# EAGLE board SparkySpecialK (EAGLE 6.5.0)
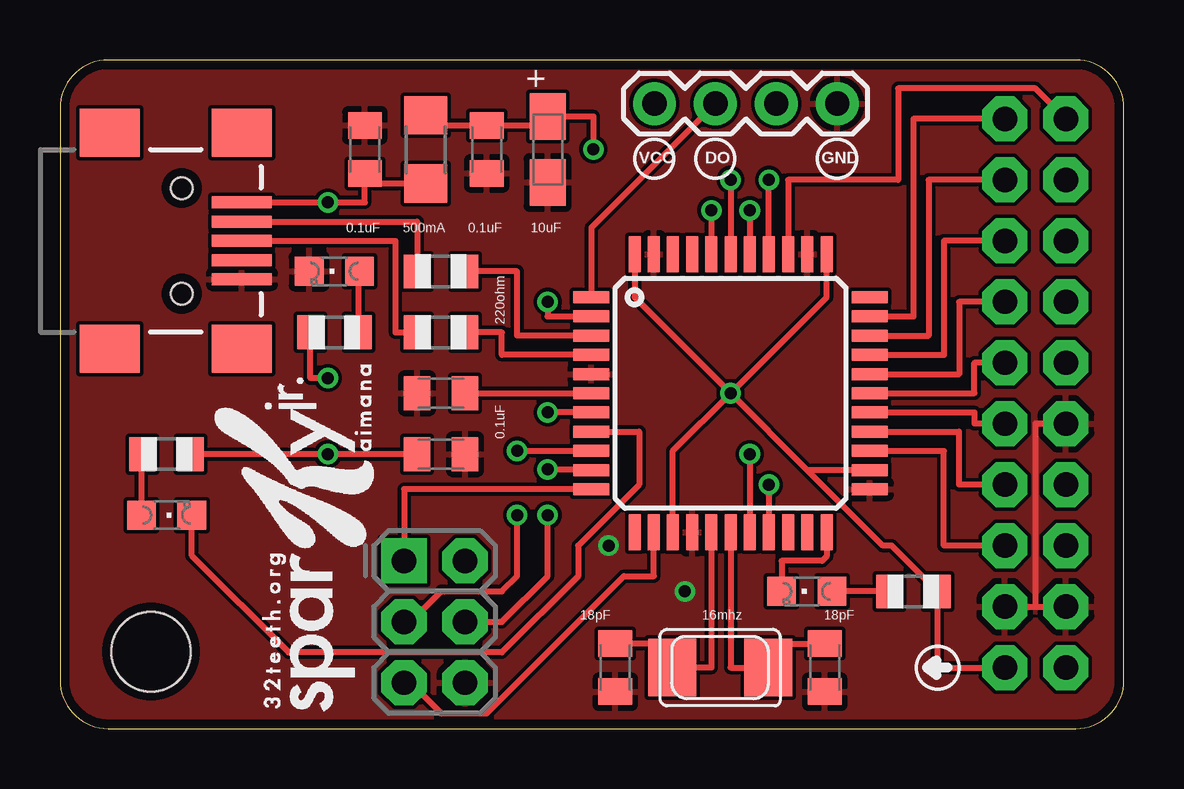
[diagram p0: board, top side]
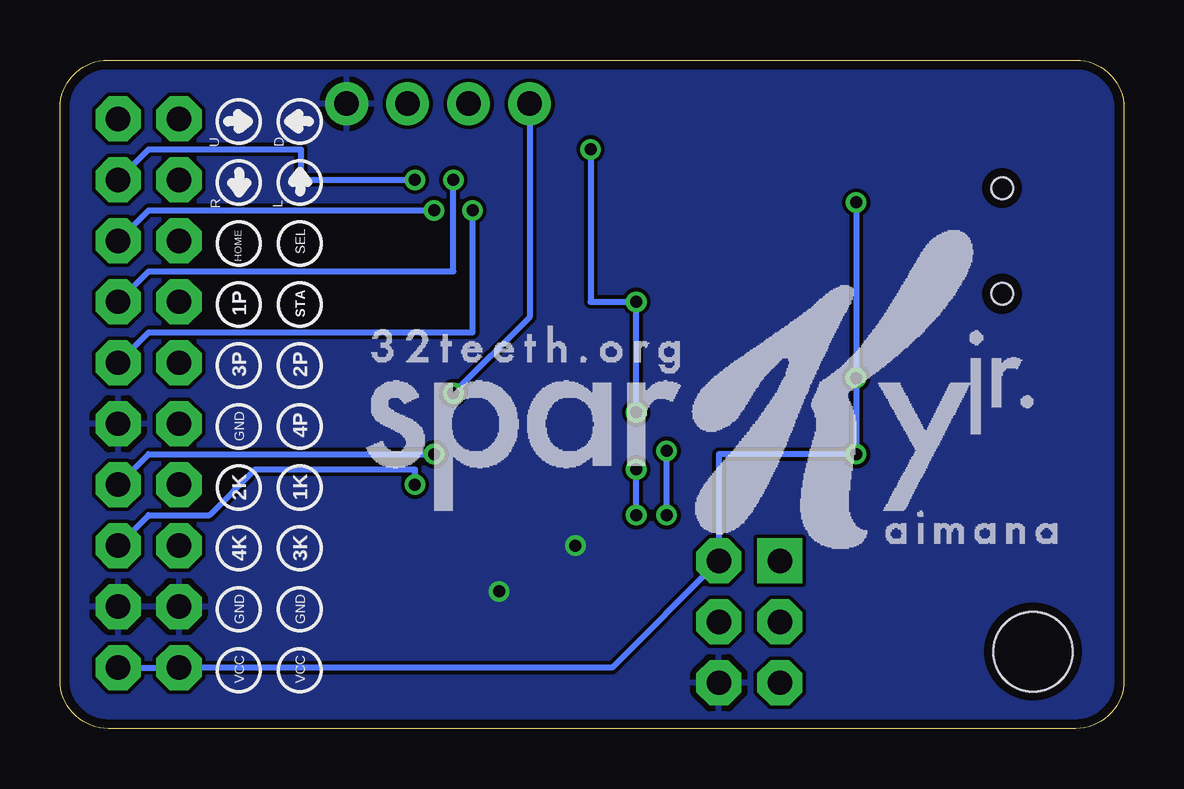
[diagram p1: board, bottom side, seen from below]

Size 44.33 x 27.86 mm. Coordinates in mm from the lower left corner, seen from the top.
Outline: 44.33,2 44.33,25.86 arc90 42.33,27.86 2,27.86 arc90 0,25.86 0,2 arc90 2,0 42.33,0 arc90 44.33,2
Copper layers (1*16): Top 0.0356mm / dielectric 1.5011mm / Bottom 0.0356mm
Design rules "LaenPCBOrder": minimum track width 6mil, minimum drill 13mil, track to track 6mil, track to pad 6mil, pad to pad 6mil, via to via 6mil, smd to smd 6mil, copper to edge 15mil, drill to drill 6mil, minimum pad ring 7mil, minimum via ring 7mil, stop-mask expansion 3mil, vias tented up to drill 0mil, thermal gap 10mil

## Footprints (pad centres in the part's own frame; a part is rotated, then mirrored left to right if it is on the bottom)
C0805K = smd 1.1 x 1.4: 1 -1,0; 2 1,0
A/3216-18R = smd 1.95 x 1.5: + 1.375,0; - -1.375,0
USB-MINIB = smd 2.5 x 0.5: D+ 2.5,0; D- 2.5,0.8; GND 2.5,-1.6; ID 2.5,-0.8; VBUS 2.5,1.6 | smd 2.5 x 2: MTN1 -3,4.5; MTN2 2.5,4.5; MTN3 -3,-4.5; MTN4 2.5,-4.5 | hole 0.9: 0,2.2; 0,-2.2
TQFP44 = smd 1.5 x 0.5: 1 -5.8,4; 2 -5.8,3.2; 3 -5.8,2.4; 4 -5.8,1.6; 5 -5.8,0.8; 6 -5.8,0; 7 -5.8,-0.8; 8 -5.8,-1.6; 9 -5.8,-2.4; 10 -5.8,-3.2; 11 -5.8,-4; 23 5.8,-4; 24 5.8,-3.2; 25 5.8,-2.4; 26 5.8,-1.6; 27 5.8,-0.8; 28 5.8,0; 29 5.8,0.8; 30 5.8,1.6; 31 5.8,2.4; 32 5.8,3.2; 33 5.8,4 | smd 0.5 x 1.5: 12 -4,-5.8; 13 -3.2,-5.8; 14 -2.4,-5.8; 15 -1.6,-5.8; 16 -0.8,-5.8; 17 0,-5.8; 18 0.8,-5.8; 19 1.6,-5.8; 20 2.4,-5.8; 21 3.2,-5.8; 22 4,-5.8; 34 4,5.8; 35 3.2,5.8; 36 2.4,5.8; 37 1.6,5.8; 38 0.8,5.8; 39 0,5.8; 40 -0.8,5.8; 41 -1.6,5.8; 42 -2.4,5.8; 43 -3.2,5.8; 44 -4,5.8
2X3-NS = drill 1.016 pad 1.88 square: 1 -2.54,-1.27 | drill 1.016 pad 1.88 octagon: 2 -2.54,1.27; 3 0,-1.27; 4 0,1.27; 5 2.54,-1.27; 6 2.54,1.27
1X04-BIG = drill 1.016 pad 1.778: 1 0,0; 2 2.54,0; 3 5.08,0; 4 7.62,0
STAND-OFF = hole 3.302: 0,0
R1206 = smd 1.6 x 1.803: 1 -1.422,0; 2 1.422,0
CHIPLED_0805 = smd 1.2 x 1.2: A 0,-1.05; C 0,1.05
R0805 = smd 1.1 x 1.4: 1 -1,0; 2 1,0
2X10_NOSILK = drill 1.016 pad 1.88 octagon: 1 -11.43,-1.27; 2 -11.43,1.27; 3 -8.89,-1.27; 4 -8.89,1.27; 5 -6.35,-1.27; 6 -6.35,1.27; 7 -3.81,-1.27; 8 -3.81,1.27; 9 -1.27,-1.27; 10 -1.27,1.27; 11 1.27,-1.27; 12 1.27,1.27; 13 3.81,-1.27; 14 3.81,1.27; 15 6.35,-1.27; 16 6.35,1.27; 17 8.89,-1.27; 18 8.89,1.27; 19 11.43,-1.27; 20 11.43,1.27
NX5032 = smd 2 x 2.4: P$1 2,0; P$2 -2,0

## Placement (x,y rotation side)
C1  0.1uF  [C0805K]  15.88,13.97 180 top
C2  18pF  [C0805K]  31.86,2.54 270 top
C3  18pF  [C0805K]  23.14,2.54 270 top
C4  0.1uF  [C0805K]  17.78,24.13 270 top
C5  10uF  [A/3216-18R]  20.32,24.13 90 top
C6  0.1uF  [C0805K]  12.7,24.13 90 top
C7  0.1uF  [C0805K]  15.88,11.43 0 top
CN1  MiniB USB  [USB-MINIB]  5.08,20.32 0 top
IC1  ATMEGA32U4-AU  [TQFP44]  27.94,13.97 0 top
ISP6  AVR_SPI_PRG_6NS  [2X3-NS]  15.61,4.45 270 top
JP1  1X4-BIG  [1X04-BIG]  32.38,26.04 180 top
JP2  STAND-OFF  [STAND-OFF]  3.79,3.2 90 top
L1  500mA  [R1206]  15.24,24.13 90 top
PWR  LED  [CHIPLED_0805]  11.43,19.05 90 top
PWR1  LED  [CHIPLED_0805]  4.45,8.89 270 top
PWR2  LED  [CHIPLED_0805]  31.11,5.71 90 top
R1  220ohm  [R0805]  15.88,19.05 0 top
R2  1K  [R0805]  11.43,16.51 180 top
R3  220ohm  [R0805]  15.88,16.51 0 top
R4  1K  [R0805]  4.45,11.43 0 top
R5  1K  [R0805]  35.56,5.71 0 top
U$1  M10X2NOSILK  [2X10_NOSILK]  40.64,13.97 270 top
X3  16MHz  [NX5032]  27.5,2.54 180 top

## Library data of the parts
C1-C7 JP1 L1 PWR PWR1 PWR2 R1-R5 = adafruit
CN1 = SparkFun-Connectors
IC1 X3 = adaprog
ISP6 JP2 U$1 = SparkFun

## Nets
+5V: C4.1 C5.+ IC1.2 IC1.7 L1.2
A0: IC1.36 U$1.2
A1: IC1.37 U$1.4
A2: IC1.38 U$1.6
A3: IC1.39 U$1.8
A4: IC1.40 U$1.10
A5: IC1.41
D0/RX: IC1.20
D1/TX: IC1.21
D2: IC1.19 U$1.16
D3: IC1.18 U$1.14
D4: IC1.25 U$1.15
D5: IC1.31 U$1.3
D6: IC1.27 U$1.11
D7: IC1.1 JP1.3
D8: IC1.28 U$1.9
D9: IC1.29 U$1.7
D10: IC1.30 U$1.5
D11: IC1.12
D12: IC1.26 U$1.13
D13: IC1.32 U$1.1
D15: IC1.9 ISP6.3
D16: IC1.10 ISP6.4
D17: IC1.11 ISP6.1
D+: IC1.4 R3.2
D-: IC1.3 R1.2
GND: C1.2 C2.2 C3.2 C4.2 C5.- C6.2 C7.2 CN1.GND IC1.5 IC1.15 IC1.23 IC1.35 IC1.43 ISP6.6 JP1.1 PWR.C U$1.12 U$1.17 U$1.18
HWB: IC1.33
N$2: PWR.A R2.1
N$3: CN1.D+ R3.1
N$4: C1.1 IC1.6
N$5: CN1.D- R1.1
N$6: PWR1.A R4.1
N$7: PWR2.A R5.1
N$8: C2.1 IC1.17 X3.P$2
N$9: C3.1 IC1.16 X3.P$1
RST: IC1.13 ISP6.5
RXLED: IC1.8 PWR1.C
TXLED: IC1.22 PWR2.C
VCC: C6.1 C7.1 CN1.VBUS IC1.14 IC1.24 IC1.34 IC1.44 ISP6.2 JP1.4 L1.1 R2.2 R4.2 R5.2 U$1.19 U$1.20

## Tracks (layer width: path | path; a pad name or v marks a point on that pad's centre or on a via)
+5V  (via drill 0.5)
  Top 0.254: L1.2 15.24,25.13 C4.1 19.95,25.13 arc90 C5.+ 22.23,25.5 v22.23,24.13 | v20.32,17.78 20.32,17.17 IC1.2 | IC1.7 v20.32,13.17
  Bottom 0.254: v22.23,24.13 22.23,17.78 v20.32,17.78 v20.32,13.17
A0
  Top 0.254: U$1.2 40.64,26.67 34.92,26.67 34.92,22.86 30.34,22.86 IC1.36
A1  (via drill 0.5)
  Top 0.254: IC1.37 v29.54,22.86
  Bottom 0.254: U$1.4 40.64,24.13 34.29,24.13 34.29,22.86 v29.54,22.86
A2  (via drill 0.5)
  Top 0.254: v28.74,21.59 IC1.38
  Bottom 0.254: U$1.6 40.64,21.59 v28.74,21.59
A3  (via drill 0.5)
  Top 0.254: v27.94,22.86 IC1.39
  Bottom 0.254: U$1.8 40.64,19.05 27.94,19.05 v27.94,22.86
A4  (via drill 0.5)
  Top 0.254: v27.14,21.59 IC1.40
  Bottom 0.254: U$1.10 40.64,16.51 27.14,16.51 v27.14,21.59
D2  (via drill 0.5)
  Top 0.254: v29.54,10.16 IC1.19
  Bottom 0.254: U$1.16 40.64,8.89 38.1,8.89 36.2,10.79 29.54,10.79 v29.54,10.16
D3  (via drill 0.5)
  Top 0.254: v28.74,11.43 IC1.18
  Bottom 0.254: U$1.14 40.64,11.43 v28.74,11.43
D4
  Top 0.254: U$1.15 36.83,7.62 36.83,11.57 IC1.25
D5
  Top 0.254: U$1.3 36.2,22.86 36.2,16.37 IC1.31
D6
  Top 0.254: U$1.11 38.1,12.7 38.1,13.17 IC1.27
D7
  Top 0.254: JP1.3 22.14,20.87 IC1.1
D8
  Top 0.254: U$1.9 38.1,15.24 38.1,13.97 IC1.28
D9
  Top 0.254: U$1.7 37.47,17.78 37.47,14.77 IC1.29
D10
  Top 0.254: U$1.5 36.83,20.32 36.83,15.57 IC1.30
D12
  Top 0.254: U$1.13 37.47,10.16 37.47,12.37 IC1.26
D13
  Top 0.254: U$1.1 35.56,25.4 35.56,17.17 IC1.32
D15  (via drill 0.5)
  Top 0.254: ISP6.3 14.61,4.45 15.88,5.71 18.41,5.71 19.05,6.35 v19.05,8.89 | v19.05,11.57 IC1.9
  Bottom 0.254: v19.05,8.89 v19.05,11.57
D16  (via drill 0.5)
  Top 0.254: ISP6.4 18.41,4.45 20.32,6.35 v20.32,8.89 | v20.32,10.79 22.14,10.79 IC1.10
  Bottom 0.254: v20.32,8.89 v20.32,10.79
D17
  Top 0.254: IC1.11 14.34,9.97 ISP6.1
D+
  Top 0.254: IC1.4 18.41,15.57 18.41,16.51 R3.2
D-
  Top 0.254: IC1.3 19.05,16.37 19.05,19.05 R1.2
GND  (via drill 0.5)
  Top 0.254: U$1.12 40.64,12.7 40.64,5.08 | U$1.17 40.64,5.08 | 40.64,5.08 U$1.18
  other vias: 22.86,7.62 26.04,5.71
  pour Top: 0,27.86 44.33,27.86 44.33,0 0,0
  pour Bottom: 0,27.86 44.33,27.86 44.33,0 0,0
N$2
  Top 0.254: PWR.A 12.43,19.05 R2.1
N$3
  Top 0.254: CN1.D+ 13.97,20.32 13.97,16.51 R3.1
N$4
  Top 0.254: C1.1 IC1.6
N$5
  Top 0.254: CN1.D- 14.88,21.12 R1.1
N$6
  Top 0.254: R4.1 3.4,11.43 PWR1.A
N$7
  Top 0.254: R5.1 PWR2.A
N$8
  Top 0.254: IC1.17 27.94,2.54 X3.P$2 29.5,3.54 C2.1
N$9
  Top 0.254: IC1.16 27.14,2.54 X3.P$1 25.5,3.54 C3.1
RST
  Top 0.254: ISP6.5 14.61,1.91 15.88,0.64 17.78,0.64 23.5,6.35 24.74,6.35 IC1.13
RXLED
  Top 0.254: IC1.8 24.13,12.37 24.13,10.16 21.59,7.62 21.59,6.35 18.41,3.17 9.53,3.17 5.5,7.21 PWR1.C
TXLED
  Top 0.254: IC1.22 31.94,7.17 31.75,6.99 30.07,6.99 PWR2.C
VCC  (via drill 0.5)
  Top 0.254: CN1.VBUS v11.16,21.92 12.7,21.92 C6.1 12.7,22.71 L1.1 | 23.94,20.32 IC1.44 23.94,17.97 v27.94,13.97 | C7.1 v11.16,11.43 R4.2 | v27.94,13.97 31.94,17.97 IC1.34 | IC1.24 31.14,10.77 | IC1.14 25.54,11.57 v27.94,13.97 | 31.14,10.77 v27.94,13.97 | U$1.19 36.56,2.54 R5.2 34.66,7.62 34.29,7.62 31.14,10.77 | v11.16,14.61 10.43,14.61 R2.2
  Bottom 0.254: U$1.20 U$1.19 21.32,2.54 ISP6.2 16.88,11.43 v11.16,11.43 v11.16,14.61 v11.16,21.92 | JP1.4 24.77,17.14 v27.94,13.97

## Text on the board
tPlace: VCC | DO | GND | 0.1uF | 500mA | 0.1uF | 10uF | 220ohm | 0.1uF | 18pF | 16mhz | 18pF
bPlace: D | U | L | R | SEL | HOME | STA | 1P | 2P | 3P | 4P | GND | 1K | 2K | 3K | 4K | GND | GND | VCC | VCC